# Altium PCB ScanningCaptureCard.PcbDoc
Units mm, origin at the board's own origin, x right, y up, seen from the top; angles counter-clockwise.
Board outline 172 x 100 mm, 2 copper layers (Top Layer, Bottom Layer); 73 components, 102 nets, 424 pads, 53 vias.
Unrouted connection lines stored in the file: 146.
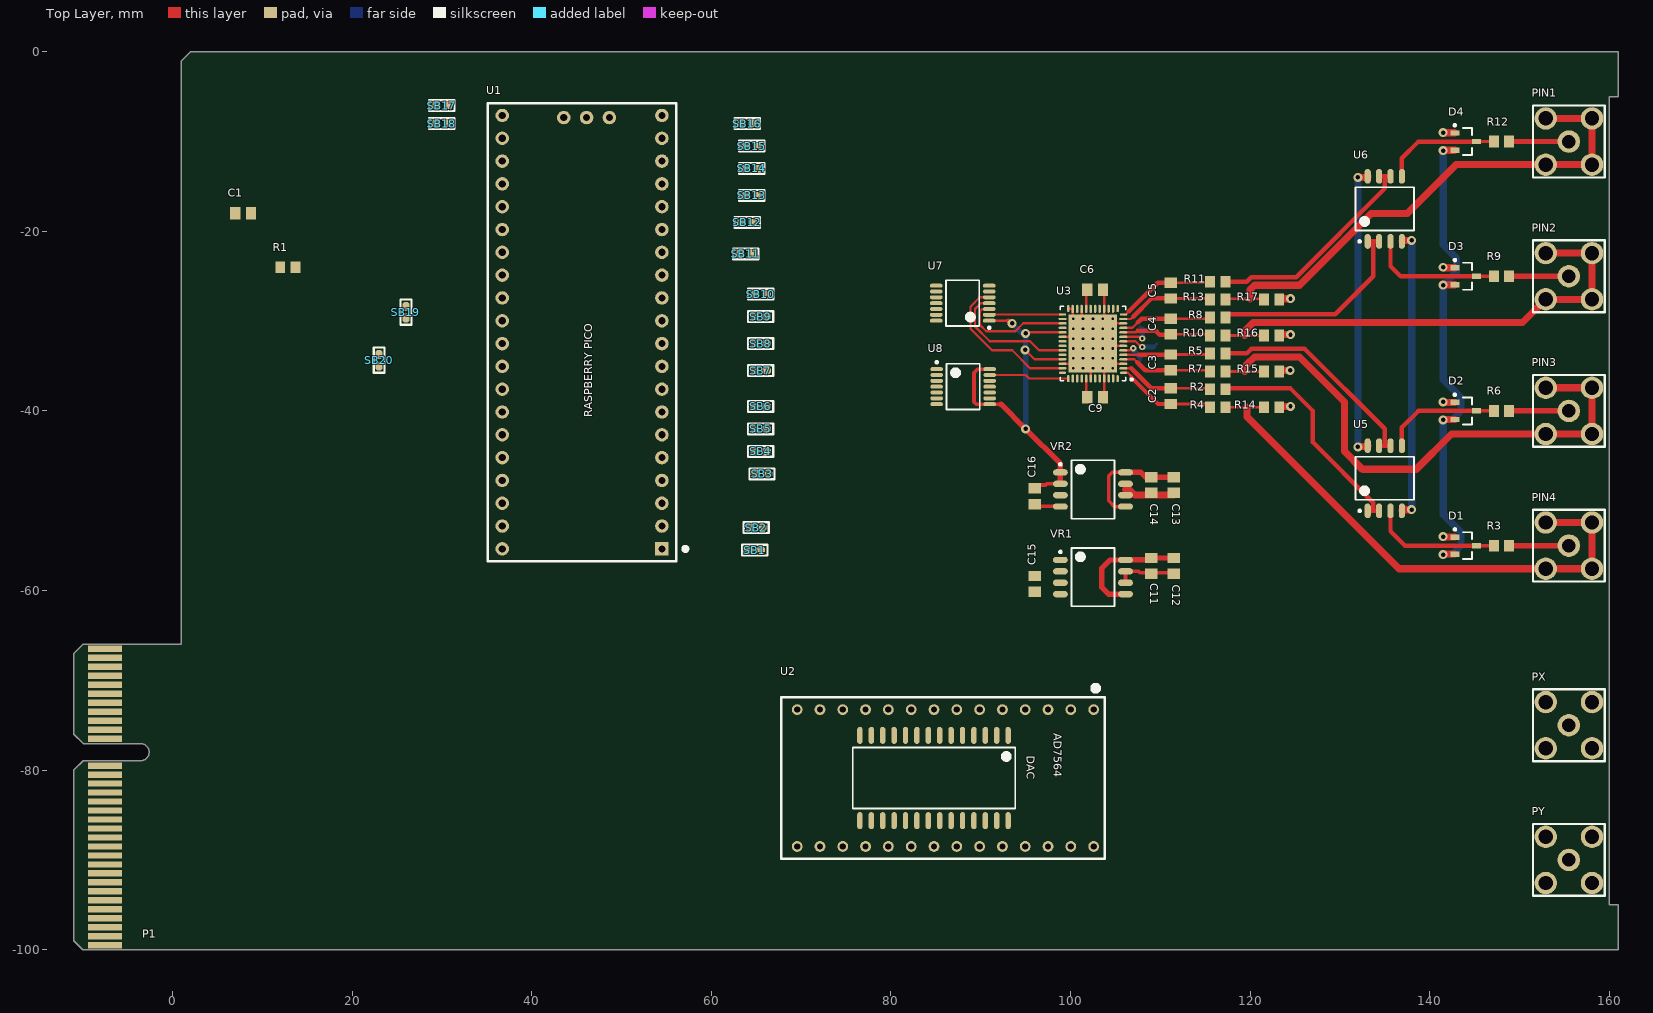
[diagram p0: Top Layer view]
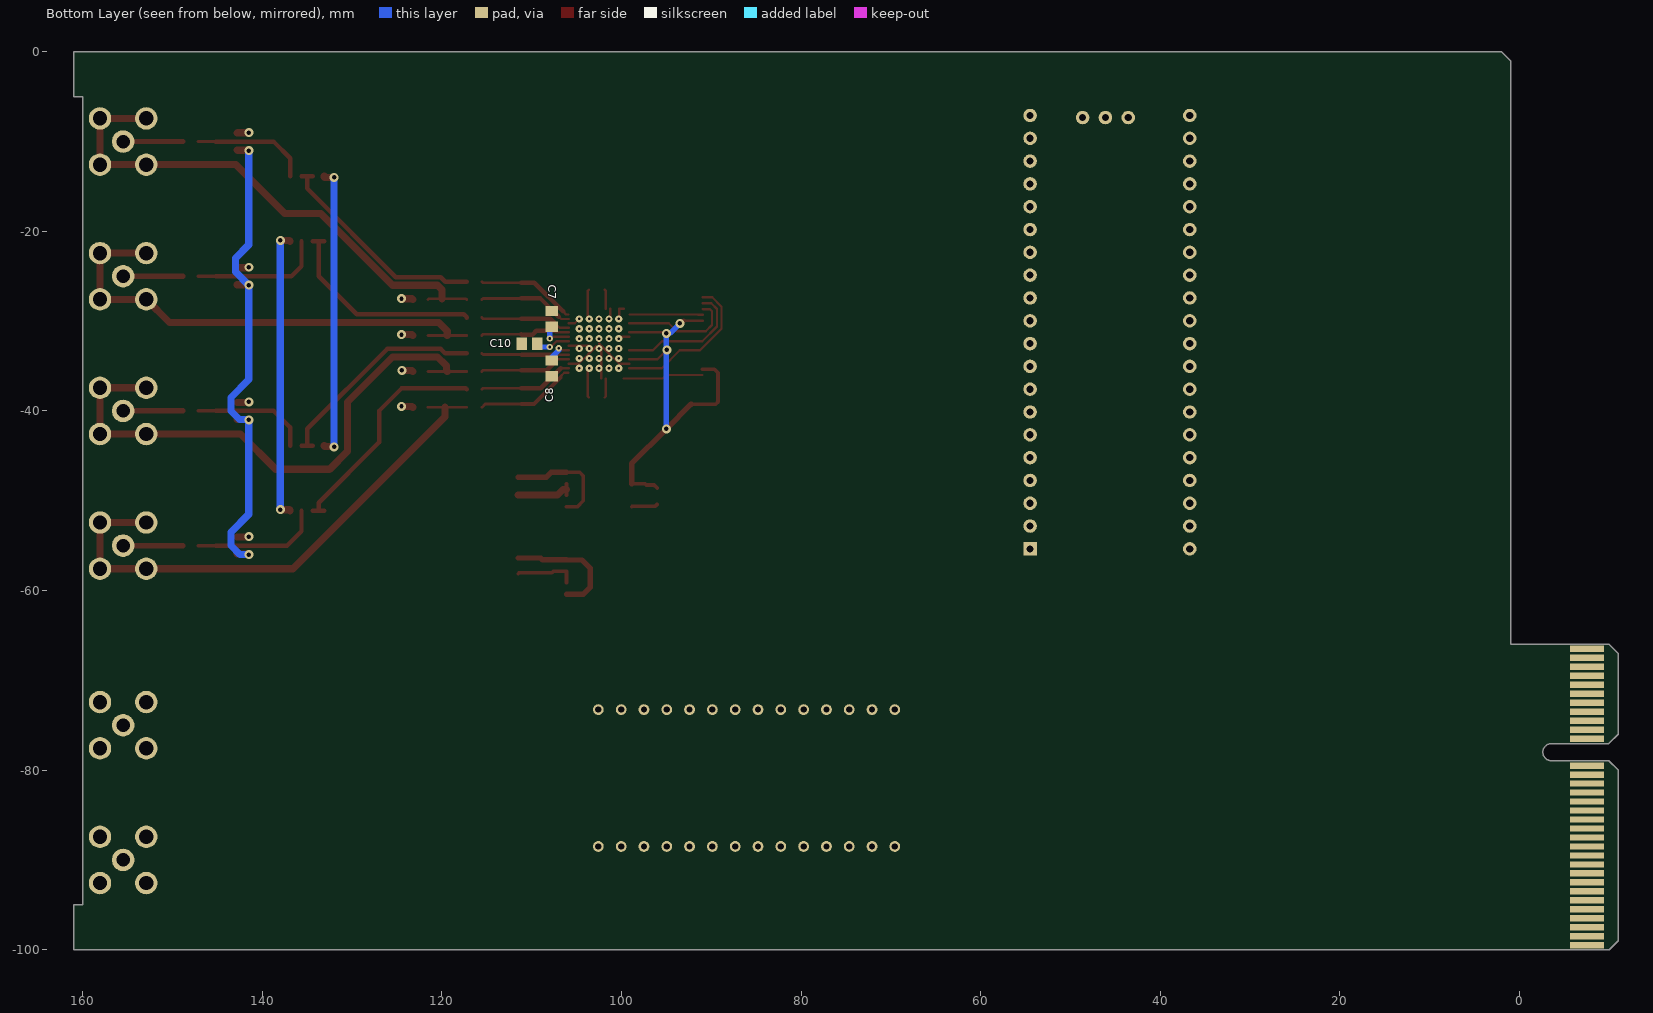
[diagram p1: Bottom Layer view, seen from below]

## Layer stack, top to bottom
Top Solder: solder mask 0.0102, Solder Resist, Dk 3.5
Top Layer: signal copper 0.0356
Dielectric 1: dielectric 0.32, FR-4, Dk 4.8
Bottom Layer: signal copper 0.0356
Bottom Solder: solder mask 0.0102, Solder Resist, Dk 3.5

## Board outline
-11,-99 -10,-100 161,-100 161,-95 160,-95 160,-5 161,-5 161,0 2,0 1,-1 1,-66 -10,-66 -11,-67 -11,-76 -9.95,-77.05 -3.55,-77.05 cw(c-3.55,-78) -3.55,-78.95 -9.95,-78.95 -11,-80

## Design rules (kind name [scope] priority, off if disabled: settings)
Clearance [All] p1: gap=0.25 ignorepadtopadclearanceinfootprint=FALSE except(0.2: Arc-SMDPad Track-SMDPad SMDPad-SMDPad)
ComponentClearance [All] p1: gap=0.4 collisioncheckmode=3 verticalgap=2540 showdistances=FALSE
DiffPairsRouting [All] p1: maxlimit=1 minlimit=0.3 mostfreqgap=0.3 toplayer_minwidth=0.25 toplayer_maxwidth=0.8 toplayer_prefwidth=0.4 bottomlayer_minwidth=0.25 bottomlayer_maxwidth=0.8 bottomlayer_prefwidth=0.4 maxuncoupledlength=6
MatchedLengths "Schematic Matched Net Lengths" [InNet('USB2_P')] p1: tolerance=2 checknetsindiffpair=TRUE checkdiffpairvsdiffpair=FALSE checkxsignals=FALSE checkothers=FALSE
PolygonConnect [All] p1: connectstyle=Relief reliefconductorwidth=0.254 reliefentries=4 polygonreliefangle="90 Angle" airgapwidth=0.254
RoomDefinition POWER [InComponentClass('POWER')] p1: confinementstyle=ConfineIn formatcopy=TRUE lockcomponents=FALSE outline -16,-102 114,-102 114,-43 -16,-43
RoomDefinition DAC [InComponentClass('DAC')] p2: confinementstyle=ConfineIn formatcopy=TRUE lockcomponents=FALSE outline 46.5,-97.5 169,-97.5 169,-63 46.5,-63
RoomDefinition ADC [InComponentClass('ADC')] p3: confinementstyle=ConfineIn formatcopy=TRUE lockcomponents=FALSE outline 92.5,-63 169,-63 169,-2.5 92.5,-2.5
RoomDefinition MCU [InComponentClass('MCU')] p4: confinementstyle=ConfineIn formatcopy=TRUE lockcomponents=FALSE outline 1,-63 92.5,-63 92.5,-2.5 1,-2.5
RoutingVias [All] p1: holewidth=0.5 width=1 viastyle="Through Hole" minholewidth=0.3 minwidth=0.7 maxholewidth=2 maxwidth=3
SolderMaskExpansion [All] p1: expansion=0 istentingtop=FALSE
Width [All] p1: maxlimit=5 minlimit=0.25 preferedwidth=0.5
28 further rules are at their usual default settings.

## Classes and differential pairs
differential pair class USB: USB2
component class POWER: C11 C12 C13 C14 C15 C16 P1 VR1 VR2
component class MCU: C1 R1 SB1 SB2 SB3 SB4 SB5 SB6 SB7 SB8 SB9 SB10 SB11 SB12 SB13 SB14 SB15 SB16 SB17 SB18 SB19 SB20 U1 U4 U7 U8
component class DAC: PX PY U2
component class ADC: C2 C3 C4 C5 C6 C7 C8 C9 C10 D1 D2 D3 D4 PIN1 PIN2 PIN3 PIN4 R2 R3 R4 R5 R6 R7 R8 R9 R10 R11 R12 R13 R14 R15 R16 R17 U3 U5 U6
differential pair USB2: +USB2_P -USB2_N

## Components (designator, comment, footprint, x,y, rotation, side; value= is the part's Value field where it differs from the comment)
C1 "0F" C0805 7.875,-18 r0 top (schematic designator C?)
C2 "220pF" C0805 111.15,-38.35 r90 top
C3 "220pF" C0805 111.15,-34.6 r90 top
C4 "220pF" C0805 111.15,-30.6 r90 top
C5 "220pF" C0805 111.15,-26.6 r90 top
C6 "10uF" C0805 102.75,-26.5 r0 top
C7 "10uF" C0805 107.75,-29.75 r90 bottom
C8 "10uF" C0805 107.75,-35.25 r270 bottom
C9 "10uF" C0805 102.75,-38.5 r0 top
C10 "10uF" C0805 110.25,-32.5 r0 bottom
C11 "10uF" C0805 109,-57.25 r90 top
C12 "1uF" C0805 111.5,-57.25 r90 top
C13 "10uF" C0805 111.5,-48.25 r90 top
C14 "1uF" C0805 109,-48.25 r90 top
C15 "0.01uF" C0805 96,-59.25 r270 top
C16 "0.01uF" C0805 96,-49.5 r270 top
D1 "BAV199" SOT23-3 144,-55 r0 top
D2 "BAV199" SOT23-3 144,-40 r0 top
D3 "BAV199" SOT23-3 144,-25 r0 top
D4 "BAV199" SOT23-3 144,-10 r0 top
P1 "10018783-10201TLF" PCIe4X -11.05,-66 r270 top
PIN1 "PCB.SMAFRA.HT" PCB.SMAFRA.HT 155.5,-10 r90 top locked
PIN2 "PCB.SMAFRA.HT" PCB.SMAFRA.HT 155.5,-25 r90 top locked
PIN3 "PCB.SMAFRA.HT" PCB.SMAFRA.HT 155.5,-40 r90 top locked
PIN4 "PCB.SMAFRA.HT" PCB.SMAFRA.HT 155.5,-55 r90 top locked
PX "PCB.SMAFRA.HT" PCB.SMAFRA.HT 155.5,-75 r90 top locked
PY "PCB.SMAFRA.HT" PCB.SMAFRA.HT 155.5,-90 r90 top locked
R1 "12K" R0805 12.85,-24 r0 top (schematic designator R?)
R2 "22R" R0805 116.4,-37.6 r180 top
R3 "22R" R0805 148,-55 r180 top
R4 "22R" R0805 116.4,-39.6 r180 top
R5 "22R" R0805 116.4,-33.6 r180 top
R6 "22R" R0805 148,-40 r180 top
R7 "22R" R0805 116.4,-35.6 r180 top
R8 "22R" R0805 116.4,-29.6 r180 top
R9 "22R" R0805 148,-25 r180 top
R10 "22R" R0805 116.4,-31.6 r180 top
R11 "22R" R0805 116.4,-25.6 r180 top
R12 "22R" R0805 148,-10 r180 top
R13 "22R" R0805 116.4,-27.6 r180 top
R14 "22R" R0805 122.4,-39.6 r0 top
R15 "22R" R0805 122.4,-35.6 r0 top
R16 "22R" R0805 122.4,-31.6 r0 top
R17 "22R" R0805 122.4,-27.6 r0 top
SB1 "SolderBridge" SB 64.85,-55.5 r180 top
SB2 "SolderBridge" SB 65,-53 r180 top
SB3 "SolderBridge" SB 65.65,-47 r180 top
SB4 "SolderBridge" SB 65.5,-44.5 r180 top
SB5 "SolderBridge" SB 65.5,-42 r180 top
SB6 "SolderBridge" SB 65.5,-39.5 r180 top
SB7 "SolderBridge" SB 65.5,-35.5 r180 top
SB8 "SolderBridge" SB 65.5,-32.5 r180 top
SB9 "SolderBridge" SB 65.5,-29.5 r180 top
SB10 "SolderBridge" SB 65.5,-27 r180 top
SB11 "SolderBridge" SB 63.85,-22.5 r180 top
SB12 "SolderBridge" SB 64,-19 r180 top
SB13 "SolderBridge" SB 64.5,-16 r180 top
SB14 "SolderBridge" SB 64.5,-13 r180 top
SB15 "SolderBridge" SB 64.5,-10.5 r180 top
SB16 "SolderBridge" SB 64,-8 r180 top
SB17 "SolderBridge" SB 30,-6 r180 top
SB18 "SolderBridge" SB 30,-8 r180 top
SB19 "SolderBridge" SB 26,-29 r90 top (schematic designator SB?)
SB20 "SolderBridge" SB 23,-34.35 r90 top (schematic designator SB?)
U1 "R PICO" RPICO 56.11,-5.73 r180 top
U2 "AD7564" AD7564 84.8,-80.88 r270 top
U3 "LTC2325-14" QFN-52 102.5,-32.5 r180 top
U5 "LT1819CS8" SOIC-8 135,-47.5 r90 top
U6 "LT1819CS8" SOIC-8 135,-17.5 r90 top
U7 "TXU0104QPW" TSOP-14 88,-28 r180 top
U8 "TXU0104QPW" TSOP-14 88.05,-37.3 r0 top
VR1 "LT1763S8" SOIC-8 102.499,-58.5 r0 top
VR2 "LT1763S8" SOIC-8 102.5,-48.75 r0 top

## Footprints (in the part's own frame and the unit in brackets; to place one, negate y for a bottom-side part, rotate by r counter-clockwise, add the part's x,y. Pads: shape width x height; smd on the part's side, far side on the other; paste and mask are expansions set on the pad)
AD7564 [mm] "SOIC, 28-Leads, Body 17.90x7.50mm, Pitch 1.27mm, IPC Medium Density"
  round 1.2 hole 0.7: 1(-7.62,17.78) 2(-7.62,15.24) 3(-7.62,12.7) 4(-7.62,10.16) 5(-7.62,7.62) 6(-7.62,5.08) 7(-7.62,2.54) 8(-7.62,0) 9(-7.62,-2.54) 10(-7.62,-5.08) 11(-7.62,-7.62) 12(-7.62,-10.16) 13(-7.62,-12.7) 14(-7.62,-15.24) 15(7.62,-15.24) 16(7.62,-12.7) 17(7.62,-10.16) 18(7.62,-7.62) 19(7.62,-5.08) 20(7.62,-2.54) 21(7.62,0) 22(7.62,2.54) 23(7.62,5.08) 24(7.62,7.62) 25(7.62,10.16) 26(7.62,12.7) 27(7.62,15.24) 28(7.62,17.78)
  oval 1.9x0.6 smd: 1(-4.75,8.255) 2(-4.75,6.985) 3(-4.75,5.715) 4(-4.75,4.445) 5(-4.75,3.175) 6(-4.75,1.905) 7(-4.75,0.635) 8(-4.75,-0.635) 9(-4.75,-1.905) 10(-4.75,-3.175) 11(-4.75,-4.445) 12(-4.75,-5.715) 13(-4.75,-6.985) 14(-4.75,-8.255) 15(4.75,-8.255) 16(4.75,-6.985) 17(4.75,-5.715) 18(4.75,-4.445) 19(4.75,-3.175) 20(4.75,-1.905) 21(4.75,-0.635) 22(4.75,0.635) 23(4.75,1.905) 24(4.75,3.175) 25(4.75,4.445) 26(4.75,5.715) 27(4.75,6.985) 28(4.75,8.255)
  silkscreen extent -10.3,-17 9,19, body extent -5.16,-9.05 5.16,9.05, height 2.65
C0805 [mm] "Chip Capacitor, 2-Leads, Body 2.00x1.27mm, IPC Medium Density"
  rect 1.15x1.4 smd: 1(-0.875,0) 2(0.875,0)
  body extent -1,-0.64 1,0.64, height 1
PCB.SMAFRA.HT [mm]
  round 2.5 hole 1.5: 1(0,0)
  round 2.5 hole 1.6: S(-2.575,-2.575) S(-2.575,2.575) S(2.575,-2.575) S(2.575,2.575)
  silkscreen extent -4,-4 4,4, body extent -3.5,-11.6 3.5,3.5, height 8.43
PCIe4X [mm]
  rect 0.7x3.8 smd far side: A1(0.5,3.55) A2(1.5,3.55) A3(2.5,3.55) A4(3.5,3.55) A5(4.5,3.55) A6(5.5,3.55) A7(6.5,3.55) A8(7.5,3.55) A9(8.5,3.55) A10(9.5,3.55) A11(10.5,3.55) A12(13.5,3.55) A13(14.5,3.55) A14(15.5,3.55) A15(16.5,3.55) A16(17.5,3.55) A17(18.5,3.55) A18(19.5,3.55) A19(20.5,3.55) A20(21.5,3.55) A21(22.5,3.55) A22(23.5,3.55) A23(24.5,3.55) A24(25.5,3.55) A25(26.5,3.55) A26(27.5,3.55) A27(28.5,3.55) A28(29.5,3.55) A29(30.5,3.55) A30(31.5,3.55) A31(32.5,3.55) A32(33.5,3.55)
  rect 0.7x3.8 smd: B1(0.5,3.55) B2(1.5,3.55) B3(2.5,3.55) B4(3.5,3.55) B5(4.5,3.55) B6(5.5,3.55) B7(6.5,3.55) B8(7.5,3.55) B9(8.5,3.55) B10(9.5,3.55) B11(10.5,3.55) B12(13.5,3.55) B13(14.5,3.55) B14(15.5,3.55) B15(16.5,3.55) B16(17.5,3.55) B17(18.5,3.55) B18(19.5,3.55) B19(20.5,3.55) B20(21.5,3.55) B21(22.5,3.55) B22(23.5,3.55) B23(24.5,3.55) B24(25.5,3.55) B25(26.5,3.55) B26(27.5,3.55) B27(28.5,3.55) B28(29.5,3.55) B29(30.5,3.55) B30(31.5,3.55) B31(32.5,3.55) B32(33.5,3.55)
QFN-52 [mm] "QFN, 52-Leads, Body 7.00x8.00mm, Pitch 0.50mm, Thermal Pad 5.41x6.45mm, IPC Medium Density"
  oval 0.8x0.25 smd mask+0: 1(-3.4,3.25) 14(-3.4,-3.25) 27(3.4,-3.25) 40(3.4,3.25)
  oval 0.9x0.25 smd mask+0: 2(-3.375,2.75) 3(-3.375,2.25) 4(-3.375,1.75) 5(-3.375,1.25) 6(-3.375,0.75) 7(-3.375,0.25) 8(-3.375,-0.25) 9(-3.375,-0.75) 10(-3.375,-1.25) 11(-3.375,-1.75) 12(-3.375,-2.25) 13(-3.375,-2.75) 28(3.375,-2.75) 29(3.375,-2.25) 30(3.375,-1.75) 31(3.375,-1.25) 32(3.375,-0.75) 33(3.375,-0.25) 34(3.375,0.25) 35(3.375,0.75) 36(3.375,1.25) 37(3.375,1.75) 38(3.375,2.25) 39(3.375,2.75)
  oval 0.25x0.8 smd mask+0: 15(-2.75,-3.9) 26(2.75,-3.9) 41(2.75,3.9) 52(-2.75,3.9)
  oval 0.25x0.9 smd mask+0: 16(-2.25,-3.875) 17(-1.75,-3.875) 18(-1.25,-3.875) 19(-0.75,-3.875) 20(-0.25,-3.875) 21(0.25,-3.875) 22(0.75,-3.875) 23(1.25,-3.875) 24(1.75,-3.875) 25(2.25,-3.875) 42(2.25,3.875) 43(1.75,3.875) 44(1.25,3.875) 45(0.75,3.875) 46(0.25,3.875) 47(-0.25,3.875) 48(-0.75,3.875) 49(-1.25,3.875) 50(-1.75,3.875) 51(-2.25,3.875)
  rect 5.41x6.45 smd mask+0: 53(0,0)
  silkscreen extent -4.43,-4.15 3.65,4.15, body extent -3.51,-4.01 3.51,4.01, height 0.75
R0805 [mm] "Chip Resistor, 2-Leads, Body 2.00x1.25mm, IPC Medium Density"
  rect 1.1x1.3 smd: 1(-0.85,0) 2(0.85,0)
  body extent -1,-0.63 1,0.63, height 1
RPICO [mm]
  rect 1.5x1.5 hole 0.8: 1(1.61,49.63)
  round 1.5 hole 0.8: 2(1.61,47.09) 3(1.61,44.55) 4(1.61,42.01) 5(1.61,39.47) 6(1.61,36.93) 7(1.61,34.39) 8(1.61,31.85) 9(1.61,29.31) 10(1.61,26.77) 11(1.61,24.23) 12(1.61,21.69) 13(1.61,19.15) 14(1.61,16.61) 15(1.61,14.07) 16(1.61,11.53) 17(1.61,8.99) 18(1.61,6.45) 19(1.61,3.91) 20(1.61,1.37) 21(19.39,1.37) 22(19.39,3.91) 23(19.39,6.45) 24(19.39,8.99) 25(19.39,11.53) 26(19.39,14.07) 27(19.39,16.61) 28(19.39,19.15) 29(19.39,21.69) 30(19.39,24.23) 31(19.39,26.77) 32(19.39,29.31) 33(19.39,31.85) 34(19.39,34.39) 35(19.39,36.93) 36(19.39,39.47) 37(19.39,42.01) 38(19.39,44.55) 39(19.39,47.09) 40(19.39,49.63) 41(12.54,1.6) 42(10,1.6) 43(7.46,1.6)
  silkscreen extent -1.2,0 21,51
SB [mm]
  oct 1x0.8 smd: 1(-0.65,0) 2(0.65,0)
  silkscreen extent -1.4,-0.6 1.4,0.6
SOIC-8 [mm] "SOIC, 8-Leads, Body 6.20x5.30mm, Pitch 1.27mm, IPC Medium Density"
  oval 1.65x0.7 smd: 1(-3.625,1.905) 2(-3.625,0.635) 3(-3.625,-0.635) 4(-3.625,-1.905) 5(3.625,-1.905) 6(3.625,-0.635) 7(3.625,0.635) 8(3.625,1.905)
  silkscreen extent -3.75,-3.25 2.4,3.25, body extent -3.9,-3.25 3.9,3.25, height 2
SOT23-3 [mm]
  rect 1x0.6 smd: 1(-1.2,0.95) 2(-1.2,-0.95) 3(1.2,0)
  silkscreen extent -1.32,-1.5 0.7,1.92, body extent -1.3,-1.5 1.3,1.5, height 1.1
TSOP-14 [mm] "TSOP, 14-Leads, Body 5.00x4.40mm, Pitch 0.65mm, IPC Medium Density"
  oval 1.4x0.45 smd: 1(-2.95,1.95) 2(-2.95,1.3) 3(-2.95,0.65) 4(-2.95,0) 5(-2.95,-0.65) 6(-2.95,-1.3) 7(-2.95,-1.95) 8(2.95,-1.95) 9(2.95,-1.3) 10(2.95,-0.65) 11(2.95,0) 12(2.95,0.65) 13(2.95,1.3) 14(2.95,1.95)
  silkscreen extent -3.08,-2.55 1.85,2.85, body extent -3.2,-2.55 3.2,2.55, height 1.2

## Part data
C1 C2 C3 C4 C5 C6 C7 C8 C9 C10 C11 C12 C13 C14 C15 C16: library part C0805
  C1: Capacitance=0F
  C2 C3 C4 C5: Capacitance=220pF
  C6 C7 C8 C9 C10 C11 C13: Capacitance=10uF
  C12 C14: Capacitance=1uF
  C15 C16: Capacitance=0.01uF
D1 D2 D3 D4: Supplier Part Number 1=BAV199E6327HTSA1CT-ND, Supplier 1=Digi-Key, Supplier 2=Mouser, Supplier Part Number 2=726-BAV199E6327HTSA1
P1: "PCIe 4x", Supplier Part Number 1=609-1964-ND, Supplier 1=Digi-Key
PIN1 PIN2 PIN3 PIN4 PX PY: Supplier Part Number 1=931-1361-ND, Supplier 1=Digi-Key, Supplier 2=Mouser, Supplier Part Number 2=960-PCB.SMAFRA.HT
R1 R2 R3 R4 R5 R6 R7 R8 R9 R10 R11 R12 R13 R14 R15 R16 R17: library part R0805
  R1: Resistance=12K
  R2 R3 R4 R5 R6 R7 R8 R9 R10 R11 R12 R13 R14 R15 R16 R17: Resistance=22R
U1: library part RaspPico
U2: "+3.3 V/+5 V, Low Power, Quad 12-Bit DAC"
U3: "Quad, 14-Bit + Sign, 5Msps/Ch / Simultaneous Sampling ADC"
U5 U6: Supplier Part Number 1=LT1819CS8#TRPBFCT-ND, Supplier 1=Digi-Key
U7 U8: Supplier Part Number 1=296-TXU0104QPWRQ1CT-ND, Supplier 1=Digi-Key, Supplier 2=Mouser, Supplier Part Number 2=595-TXU0104QPWRQ1

## Via types
v1: diameter 0.8, hole 0.3, Top Layer to Bottom Layer, 30 vias
v2: diameter 1, hole 0.5, Top Layer to Bottom Layer, 20 vias
v3: diameter 0.7, hole 0.3, Top Layer to Bottom Layer, 3 vias

## Nets (pads, with @x,y where several pads share a name; then routed paths per layer and width w, separated by ;. In a path a pad name is that pad's centre, name@x,y a point inside that pad or via, vN(x,y) a via of type N, cw(c..) or ccw(c..) an arc to the next point about the centre after c; other vN are vias at no path point)
2.5V: C16.1 U3.31 U3.37 U7.1 U8.8 U8.14 VR2.1 VR2.2 | length 46.8
  Top Layer w0.25: v2(94.943,-33.193) 96,-34.25 U3.37 ; v2(95,-31.375) 95.125,-31.25 U3.31
  Top Layer w0.3: U7.1 93.065,-29.95
  Top Layer w0.4: U8.14 89.65,-35.35 89.25,-35.75 89.25,-39 89.5,-39.25 U8.8 92.25,-39.25 ; C16.1 96.375,-48.25 97.25,-48.25 97.385,-48.115 VR2.2
  Top Layer w0.5: 93.065,-29.95 93.365,-30.25 v2(93.5,-30.25)
  Top Layer w0.6: 92.25,-39.25 v2(95,-42) 98.875,-45.875 VR2.2
  Bottom Layer w0.6: v2(93.5,-30.25) 94.548,-31.298 94.923,-31.298 v2(95,-31.375) ; v2(95,-42) 95,-33.193 v2@95,-31.642
3.3V: U1.39 U7.8 U7.14 U8.1
5V: C15.1 D1.2 D2.2 D3.2 D4.2 U3.15 U3.21 U3.43 U3.44 U3.52 VR1.1 VR1.2 | length 56
  Top Layer w0.8: v2(141.5,-56) 141.55,-55.95 D1.2 ; v2(141.5,-41) 141.55,-40.95 D2.2 ; v2(141.5,-26) 141.55,-25.95 D3.2 ; v2(141.5,-11) 141.525,-10.975 142.775,-10.975 D4.2
  Bottom Layer w0.8: v2(141.5,-56) 142.5,-56 143.5,-55 143.5,-53.5 141.5,-51.5 v2(141.5,-41) 141.538,-40.962 142.538,-40.962 143.5,-40 143.5,-38.5 141.5,-36.5 v2(141.5,-26) 143,-24.5 143,-23 141.5,-21.5 v2(141.5,-11)
6V: C11.2 C12.2 C13.2 C14.2 VR1.5 VR1.8 VR2.5 VR2.8 | length 26.1
  Top Layer w0.4: VR2.5 104.905,-50.655 104.25,-50 104.25,-47.25 104.655,-46.845 VR2.8
  Top Layer w0.6: VR1.5 104.257,-60.405 103.5,-59.649 103.5,-57.5 104.405,-56.595 VR1.8 106.143,-56.576 108.799,-56.576 C11.2 C12.2 ; VR2.8 107.845,-46.845 108.375,-47.375 C14.2 C13.2
+7: U5.8 U6.8 | length 32.4
  Top Layer w0.8: v2(132,-44) 132.038,-43.962 133.045,-43.962 133.095,-43.912 U5.8 ; v2(132,-14) 133.045,-14 133.095,-13.95 U6.8
  Bottom Layer w0.8: v2(132,-44) v2(132,-14)
+12: P1.A18 P1.A19 P1.B18 P1.B19
+24: P1.A16 P1.A17 P1.B16 P1.B17
+36: P1.A14 P1.A15 P1.B14 P1.B15
+48: P1.A12 P1.A13 P1.B12 P1.B13
-2: U5.4 U6.4 | length 32.4
  Top Layer w0.8: U5.4 136.905,-51.05 136.955,-51 v2(138,-51) ; U6.4 136.905,-21.088 136.955,-21.038 137.962,-21.038 v2(138,-21)
  Bottom Layer w0.8: v2(138,-51) v2(138,-21)
-12: P1.A25 P1.A26 P1.B25 P1.B26
-24: P1.A27 P1.A28 P1.B27 P1.B28
-36: P1.A29 P1.A30 P1.B29 P1.B30
-48: P1.A31 P1.A32 P1.B31 P1.B32
ADC_CLK: U3.41 U8.13 | length 8.9
  Top Layer w0.25: U8.13 95,-36 95.4,-36.4 U3.41
ADC_CNV: U3.24 U8.12
ADC_D1: U3.27 U7.2 | length 8.2
  Top Layer w0.25: U7.2 91.479,-29.3 91.529,-29.25 U3.27
ADC_D2: U3.29 U7.3 | length 12.5
  Top Layer w0.25: U7.3 90.912,-28.688 90.133,-28.688 89.925,-28.896 89.925,-30.425 90.625,-31.125 93.875,-31.125 94.75,-30.25 U3.29
ADC_D3: U3.35 U7.4 | length 14.7
  Top Layer w0.25: U7.4 90,-28 89.354,-28.646 89.354,-30.604 91,-32.25 95.5,-32.25 96.5,-33.25 U3.35
ADC_D4: U3.39 U7.5 | length 17.1
  Top Layer w0.25: U7.5 89.9,-27.35 88.854,-28.396 88.854,-30.854 91.25,-33.25 93.5,-33.25 95.5,-35.25 U3.39
AGND: PX.S PY.S
DAC_CLK: SB4.1 U2.16
DAC_CLR: SB5.1 U2.12
DAC_FSIN: SB1.1 U2.14
DAC_LDAC: SB2.1 U2.13
DAC_SDIN: SB3.1 U2.15
DGND: U1.3 U1.8 U1.13 U1.18 U1.23 U1.28 U1.33 U1.38 U1.42 U2.1 U2.17 U2.18 U7.7 U8.4 U8.5 U8.6 U8.7
FTDI_D0: SB13.1
FTDI_D1: SB14.1
FTDI_D2: SB15.1
FTDI_D3: SB16.1
FTDI_SCK: SB12.1
GND: C1.2 C6.2 C7.2 C8.2 C9.2 C10.2 C11.1 C12.1 C13.1 C14.1 D1.1 D2.1 D3.1 D4.1 P1.A9 P1.A10 P1.A11 P1.A20 P1.A21 P1.A22 P1.A23 P1.A24 P1.B9 P1.B10 P1.B11 P1.B20 P1.B21 P1.B22 P1.B23 P1.B24 R1.2 R14.2 R15.2 R16.2 R17.2 SB19.2 SB20.2 U2.27 U3.3 U3.7 U3.12 U3.18 U3.23 U3.25 U3.26 U3.32 U3.38 U3.46 U3.49 U3.53 VR1.3 VR1.6 VR1.7 VR2.3 VR2.6 VR2.7 | length 50.4
  Top Layer w0.25: U3.38 100.25,-34.75 U3.53@102.225,-32.775 ; U3.32 100.1,-31.75 v1(100.3,-31.95) ; U3.26 99.75,-28.625 U3.25 100.25,-29.7 v1(100.3,-29.75) ; U3.23 101.25,-29.6 v1(101.4,-29.75) ; U3.46 102.25,-32.75 U3.53 ; U3.53@102.775,-32.775 104.75,-34.75 U3.3 ; v1(103.6,-35.25) 103.75,-35.4 U3.49 103.75,-38.375 C9.2 ; U3.53@103.6,-32.75 U3.7 ; v1(103.6,-29.75) 103.75,-29.6 U3.18 103.75,-26.625 C6.2 ; v1(104.7,-29.75) 104.7,-29.754 105.196,-30.25 U3.12
  Top Layer w0.4: VR1.6 VR1.7 107.615,-57.865 107.75,-58 111.375,-58 C12.1 ; VR2.6 106.125,-48.75 VR2.7
  Top Layer w0.8: 106.125,-48.75 106.5,-48.75 107.125,-49.375 C13.1@111.5,-49.375 ; R14.2 123.35,-39.5 v2(124.5,-39.5) ; R15.2 123.35,-35.5 v2@124.5,-35.5 ; R16.2 123.35,-31.5 v2(124.5,-31.5) ; R17.2 123.35,-27.5 v2(124.5,-27.5) ; v2(141.5,-54) 141.55,-54.05 D1.1 ; v2(141.5,-39) 141.55,-39.05 D2.1 ; v2(141.5,-24) 141.55,-24.05 D3.1 ; v2(141.5,-9) 141.525,-9.025 142.775,-9.025 D4.1
  other v1: 100.3,-35.25 101.4,-35.25 102.5,-35.25 104.7,-35.25 100.3,-34.15 101.4,-34.15 102.5,-34.15 103.6,-34.15 104.7,-34.15 100.3,-33.05 101.4,-33.05 102.5,-33.05 103.6,-33.05 104.7,-33.05 101.4,-31.95 102.5,-31.95 103.6,-31.95 104.7,-31.95 100.3,-30.85 101.4,-30.85 102.5,-30.85 103.6,-30.85 104.7,-30.85 102.5,-29.75
  other v2: 124.47,-35.491
NetC1_1: C1.1 R1.1
NetC2_1: C2.1 R4.2 U3.1 | length 11.3
  Top Layer w0.25: U3.1 106.366,-35.75 106.793,-36.176 106.793,-36.282
  Top Layer w0.3: C2.1 115.175,-39.225 R4.2
  Top Layer w0.4: 106.793,-36.282 109.735,-39.225 C2.1
NetC2_2: C2.2 R2.2 U3.2 | length 10.6
  Top Layer w0.25: U3.2 106.75,-35.25
  Top Layer w0.3: C2.2 115.425,-37.475 R2.2
  Top Layer w0.5: 106.75,-35.25 108.975,-37.475 C2.2
NetC3_1: C3.1 R7.2 U3.4 | length 10.2
  Top Layer w0.25: U3.4 107.098,-34.25 107.424,-34.576
  Top Layer w0.3: C3.1 115.425,-35.475 R7.2
  Top Layer w0.5: 107.424,-34.576 108.323,-35.475 C3.1
NetC3_2: C3.2 R5.2 U3.5 | length 9.7
  Top Layer w0.25: U3.5 107.659,-33.75
  Top Layer w0.3: C3.2 115.425,-33.725 R5.2
  Top Layer w0.5: 107.659,-33.75 C3.2@111.125,-33.75
NetC4_1: C4.1 R10.2 U3.10 | length 10
  Top Layer w0.25: U3.10 107.315,-31.25 107.461,-31.104 107.461,-31.086
  Top Layer w0.3: C4.1 115.425,-31.475 R10.2
  Top Layer w0.5: 107.461,-31.086 109.501,-31.086 109.914,-31.5 111.125,-31.5 C4.1
NetC4_2: C4.2 R8.2 U3.11 | length 10.2
  Top Layer w0.25: U3.11 106.914,-30.75 107.5,-30.164 107.5,-30.15
  Top Layer w0.3: C4.2 115.425,-29.725 R8.2
  Top Layer w0.5: 107.5,-30.15 107.925,-29.725 C4.2
NetC5_1: C5.1 R13.2 U3.13 | length 10.7
  Top Layer w0.25: U3.13 106.75,-29.75 107,-29.5
  Top Layer w0.3: C5.1 115.425,-27.475 R13.2
  Top Layer w0.5: 107,-29.5 109.025,-27.475 C5.1
NetC5_2: C5.2 R11.2 U3.14 | length 11.2
  Top Layer w0.25: U3.14 106.175,-29.25 106.5,-28.925
  Top Layer w0.3: C5.2 115.425,-25.725 R11.2
  Top Layer w0.5: 106.5,-28.925 109.7,-25.725 C5.2
NetC6_1: C6.1 U3.22 | length 2.2
  Top Layer w0.25: U3.22 101.75,-26.625 C6.1
NetC7_1: C7.1 U3.9 | length 3.6
  Top Layer w0.25: U3.9 107.692,-31.75 107.878,-31.936 v3(108,-31.936)
  Bottom Layer w0.3: C7.1 C7.1@108,-30.875
  Bottom Layer w0.6: v3(108,-31.936) C7.1@108,-30.875
NetC8_1: C8.1 U3.6 | length 2.9
  Top Layer w0.25: U3.6 106.633,-33.25 106.87,-33.013 v3(106.987,-33.013)
  Bottom Layer w0.3: C8.1 C8.1@107.75,-34
  Bottom Layer w0.6: v3(106.987,-33.013) 107.006,-33.032 107.006,-33.256 C8.1@107.75,-34
NetC9_1: C9.1 U3.45 | length 2.2
  Top Layer w0.25: U3.45 101.75,-38.375 C9.1
NetC15_2: C15.2 VR1.4
NetC16_2: C16.2 VR2.4 | length 3
  Top Layer w0.4: C16.2 96.223,-50.598 98.818,-50.598 VR2.4
NetD1_3: D1.3 R3.2 U5.3 | length 14.4
  Top Layer w0.381: D1.3 R3.2
  Top Layer w0.5: U5.3 135.635,-53.385 137.25,-55 D1.3
NetD2_3: D2.3 R6.2 U5.5 | length 13
  Top Layer w0.381: D2.3 R6.2
  Top Layer w0.5: U5.5 136.905,-41.845 138.75,-40 D2.3
NetD3_3: D3.3 R9.2 U6.3 | length 14.7
  Top Layer w0.381: D3.3 R9.2
  Top Layer w0.5: U6.3 135.635,-23.885 136.75,-25 D3.3
NetD4_3: D4.3 R12.2 U6.5 | length 13
  Top Layer w0.381: D4.3 R12.2
  Top Layer w0.5: U6.5 136.905,-11.845 138.75,-10 D4.3
NetPIN1_1: PIN1.1 R12.1 | length 6.6
  Top Layer w0.6: R12.1 PIN1.1
NetPIN2_1: PIN2.1 R9.1 | length 6.6
  Top Layer w0.6: R9.1 PIN2.1
NetPIN3_1: PIN3.1 R6.1 | length 6.6
  Top Layer w0.6: R6.1 PIN3.1
NetPIN4_1: PIN4.1 R3.1 | length 6.6
  Top Layer w0.6: R3.1 PIN4.1
NetR2_1: R2.1 U5.1 U5.2 | length 26
  Top Layer w0.5: R2.1 117.35,-37.5 124.5,-37.5 127,-40 127,-43.5 133.73,-50.23 133.73,-51.125 ; U5.1 133.73,-51.125 ; U5.2 133.73,-51.125
NetR5_1: R5.1 U5.6 U5.7 | length 24.8
  Top Layer w0.5: R5.1 119.627,-33.6 120.127,-33.1 126.1,-33.1 135,-42 135,-43.875 ; U5.7 135,-43.875 ; U5.6 135,-43.875
NetR8_1: R8.1 U6.1 U6.2 | length 23.6
  Top Layer w0.5: R8.1 117.25,-29.55 117.55,-29.25 129.5,-29.25 133.73,-25.02 133.73,-21.125 ; U6.1 133.73,-21.125 ; U6.2 133.73,-21.125
NetR11_1: R11.1 U6.6 U6.7 | length 24.7
  Top Layer w0.5: R11.1 119.627,-25.6 120.127,-25.1 125.127,-25.1 135,-15.227 135,-13.875 ; U6.7 135,-13.875 ; U6.6 135,-13.875
NetSB1_2: SB1.2 U1.1
NetSB2_2: SB2.2 U1.2
NetSB3_2: SB3.2 U1.4
NetSB4_2: SB4.2 U1.5
NetSB5_2: SB5.2 U1.6
NetSB6_1: SB6.1 U8.2
NetSB6_2: SB6.2 U1.7
NetSB7_1: SB7.1 U7.13
NetSB7_2: SB7.2 U1.9
NetSB8_1: SB8.1 U7.12
NetSB8_2: SB8.2 U1.10
NetSB9_1: SB9.1 U7.11
NetSB9_2: SB9.2 U1.11
NetSB10_1: SB10.1 U7.10
NetSB10_2: SB10.2 U1.12
NetSB11_1: SB11.1 U8.3
NetSB11_2: SB11.2 U1.14
NetSB12_2: SB12.2 U1.15
NetSB13_2: SB13.2 U1.16
NetSB14_2: SB14.2 U1.17
NetSB15_2: SB15.2 U1.19
NetSB16_2: SB16.2 U1.20
NetSB17_1: SB17.1 SB18.1 U1.21
NetSB17_2: SB17.2
NetSB18_2: SB18.2
NetSB19_1: SB19.1
NetSB20_1: SB20.1
P1GND: PIN1.S R13.1 R17.1 | length 59.5
  Top Layer w0.3: R13.1 117.35,-27.5 120,-27.5 121.45,-27.5 R17.1
  Top Layer w0.8: 120,-27.5 120,-26.5 120.5,-26 125.5,-26 133.5,-18 137.5,-18 142.925,-12.575 152.925,-12.575 158.075,-12.575 158.075,-7.425 PIN1.S@152.925,-7.425
P2GND: PIN2.S R10.1 R16.1 | length 55.2
  Top Layer w0.3: R10.1 119.4,-31.6 R16.1
  Top Layer w0.8: 119.4,-31.6 119.4,-31.1 120.35,-30.15 150.35,-30.15 152.925,-27.575 158.075,-27.575 158.075,-22.425 PIN2.S@152.925,-22.425
P3GND: PIN3.S R7.1 R15.1 | length 64.3
  Top Layer w0.3: R7.1 119.4,-35.6 R15.1
  Top Layer w0.8: 119.4,-35.6 119.5,-35.5 119.5,-34.969 119.969,-34.5 120,-34.5 120.5,-34 125.5,-34 130.5,-39 130.5,-44.5 132.5,-46.5 138.5,-46.5 142.425,-42.575 152.925,-42.575 158.075,-42.575 158.075,-37.425 PIN3.S@152.925,-37.425
P4GND: PIN4.S R4.1 R14.1 | length 61.1
  Top Layer w0.3: R4.1 119.65,-39.6 R14.1
  Top Layer w0.8: 119.65,-39.6 119.65,-40.65 136.575,-57.575 152.925,-57.575 158.075,-57.575 158.075,-52.425 PIN4.S@152.925,-52.425
SDWIO: U1.41
SWCLK: U1.43
UGND: P1.A2 P1.A3 P1.A5 P1.A7 P1.A8 P1.B2 P1.B3 P1.B5 P1.B7 P1.B8
USB2_N: P1.A1
USB2_P: P1.B1
USB3_RX_N: P1.B6
USB3_RX_P: P1.B4
USB3_TX_N: P1.A6
USB3_TX_P: P1.A4
VCC: U2.3
VREF: C10.1 U3.8 | length 4.2
  Top Layer w0.25: U3.8 107.25,-32.25 107.886,-32.886 v3(108,-32.886)
  Bottom Layer w0.25: C10.1@109.239,-32.886 C10.1@109.625,-32.5
  Bottom Layer w0.6: v3(108,-32.886) C10.1@109.239,-32.886
pads on no net: PX.1 PY.1 U1.22 U1.24 U1.25 U1.26 U1.27 U1.29 U1.30 U1.31 U1.32 U1.34 U1.35 U1.36 U1.37 U1.40 U2.2 U2.4 U2.5 U2.6 U2.7 U2.8 U2.9 U2.10 U2.11 U2.19 U2.20 U2.21 U2.22 U2.23 U2.24 U2.25 U2.26 U2.28 U3.16 U3.17 U3.19 U3.20 U3.28 U3.30 U3.33 U3.34 U3.36 U3.40 U3.42 U3.47 U3.48 U3.50 U3.51 U7.6 U7.9 U8.9 U8.10 U8.11

## Silkscreen, mask and mechanical layers (free items; w line width, h text height)
Mechanical 1:
  lines w0.1: 1,-1 1,-63 1,-66 -10,-66 -11,-67 -11,-76 -9.95,-77.05 -3.55,-77.05 cw(c-3.55,-78) -3.55,-78.95 -9.95,-78.95 -11,-80 -11,-99 -10,-100 161,-100 161,-95 160,-95 160,-5 161,-5 161,0 2,0 ; 1,-1 2,0 ; 1,-1 1,-1 ; 2,0 2,0
  lines w0.3: 0,-97.5 160,-97.5 ; 1,-2.5 160,-2.5

## Text inside footprints (layer, text, board x,y; h text height)
U1: Top Overlay "RASPBERRY PICO" at 47.093,-40.73 h1.5 r90
U2: Top Overlay "DAC" at 94.817,-78.38 h1.5 r270